# EAGLE board Skematik (EAGLE 9.6.2)
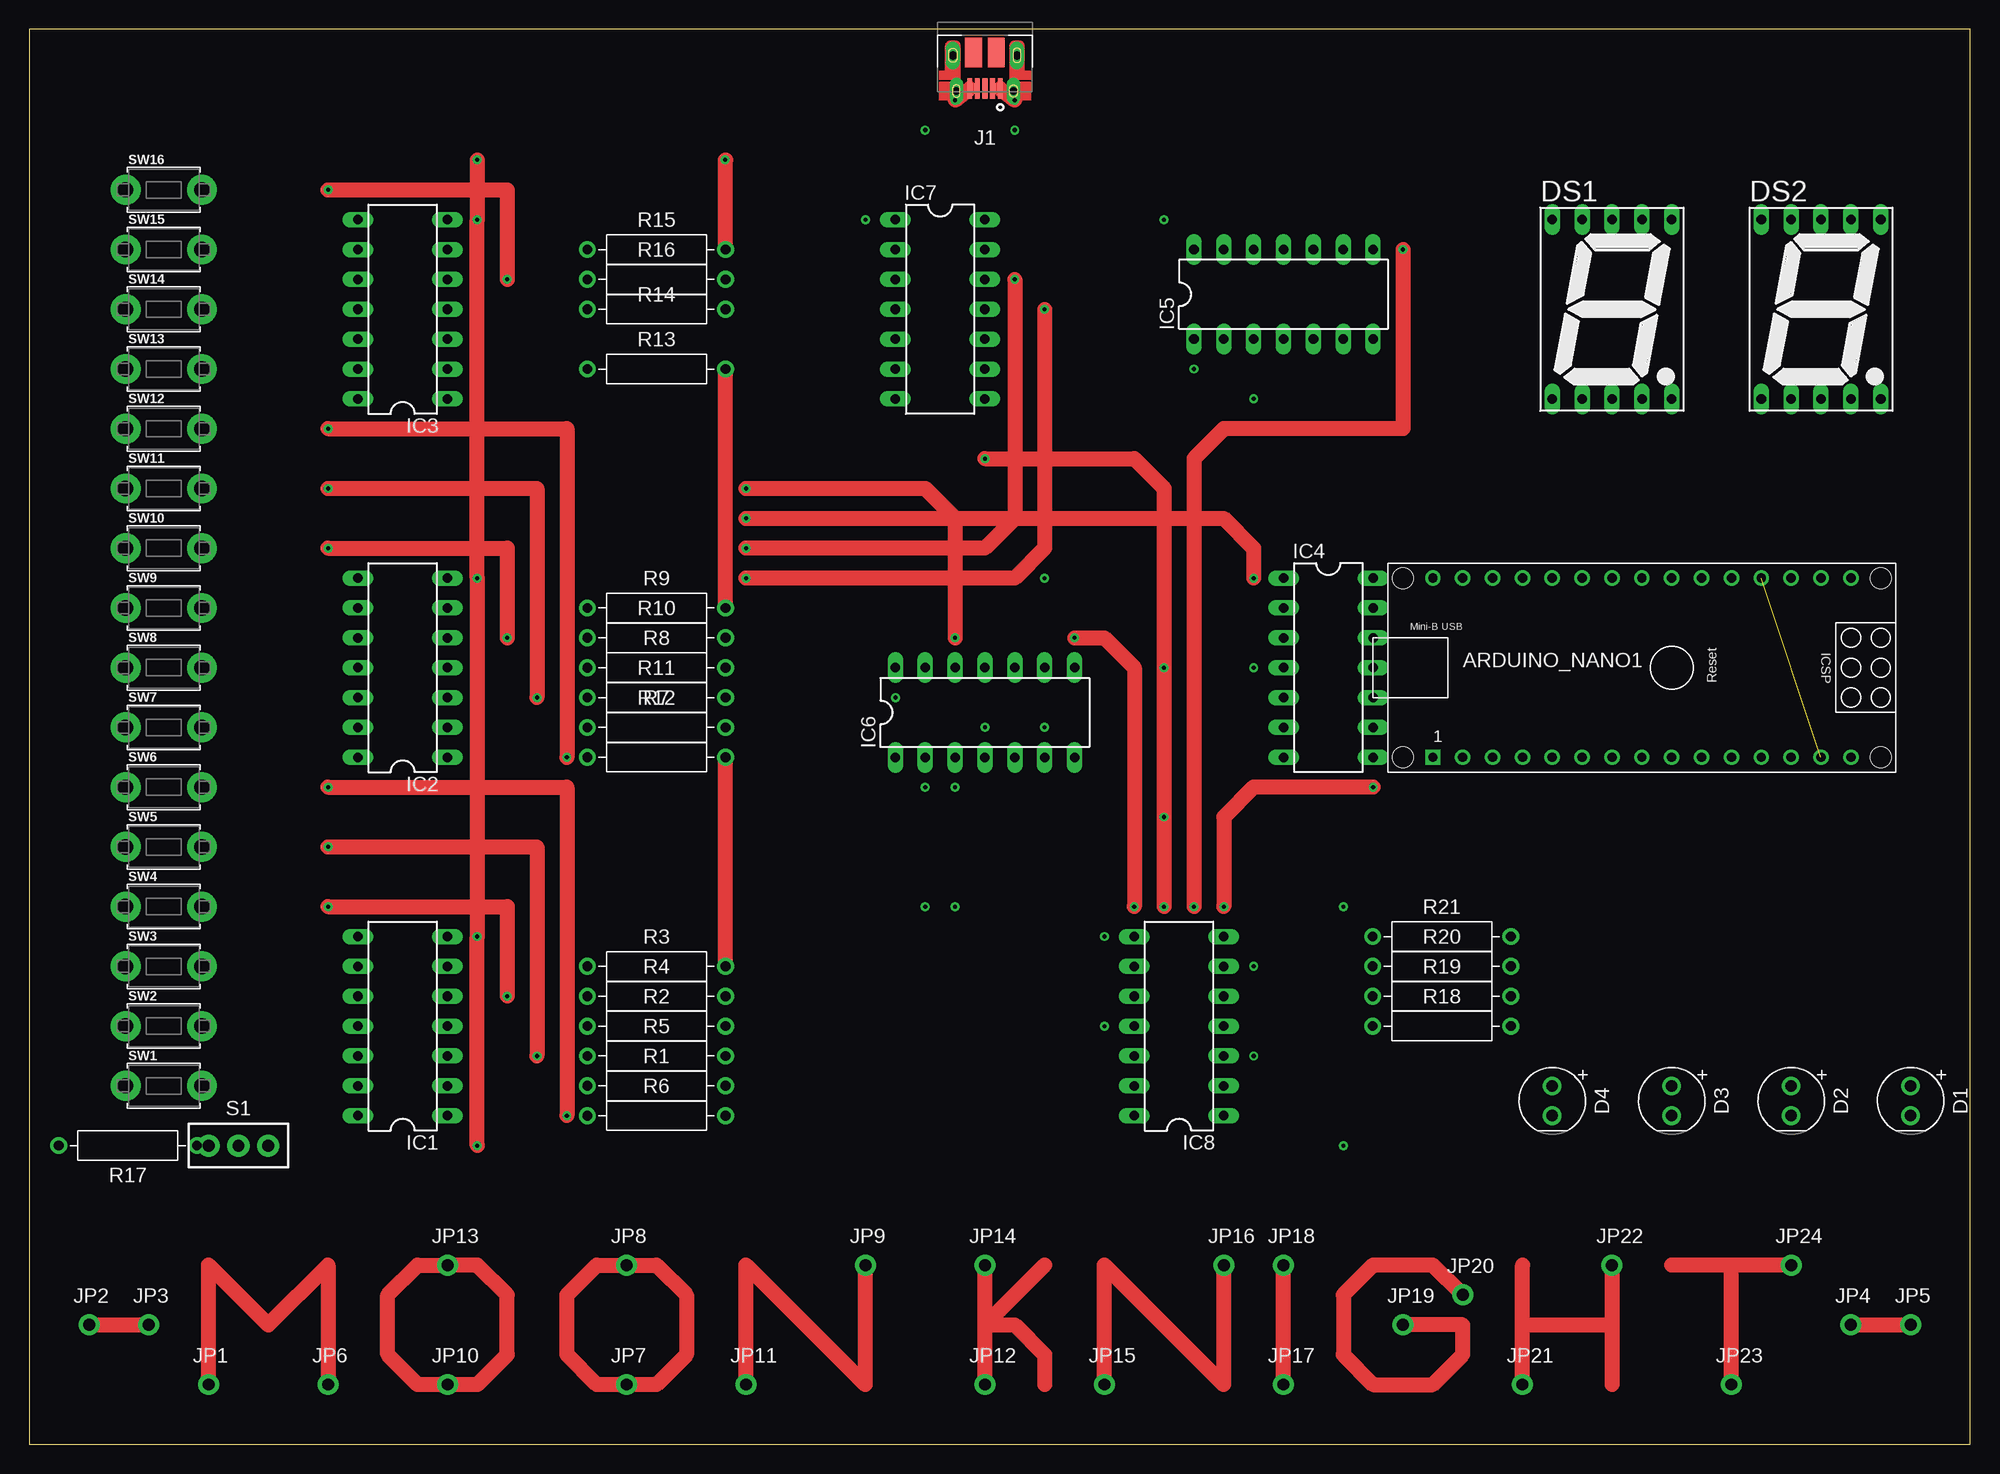
[diagram p0: board, top side]
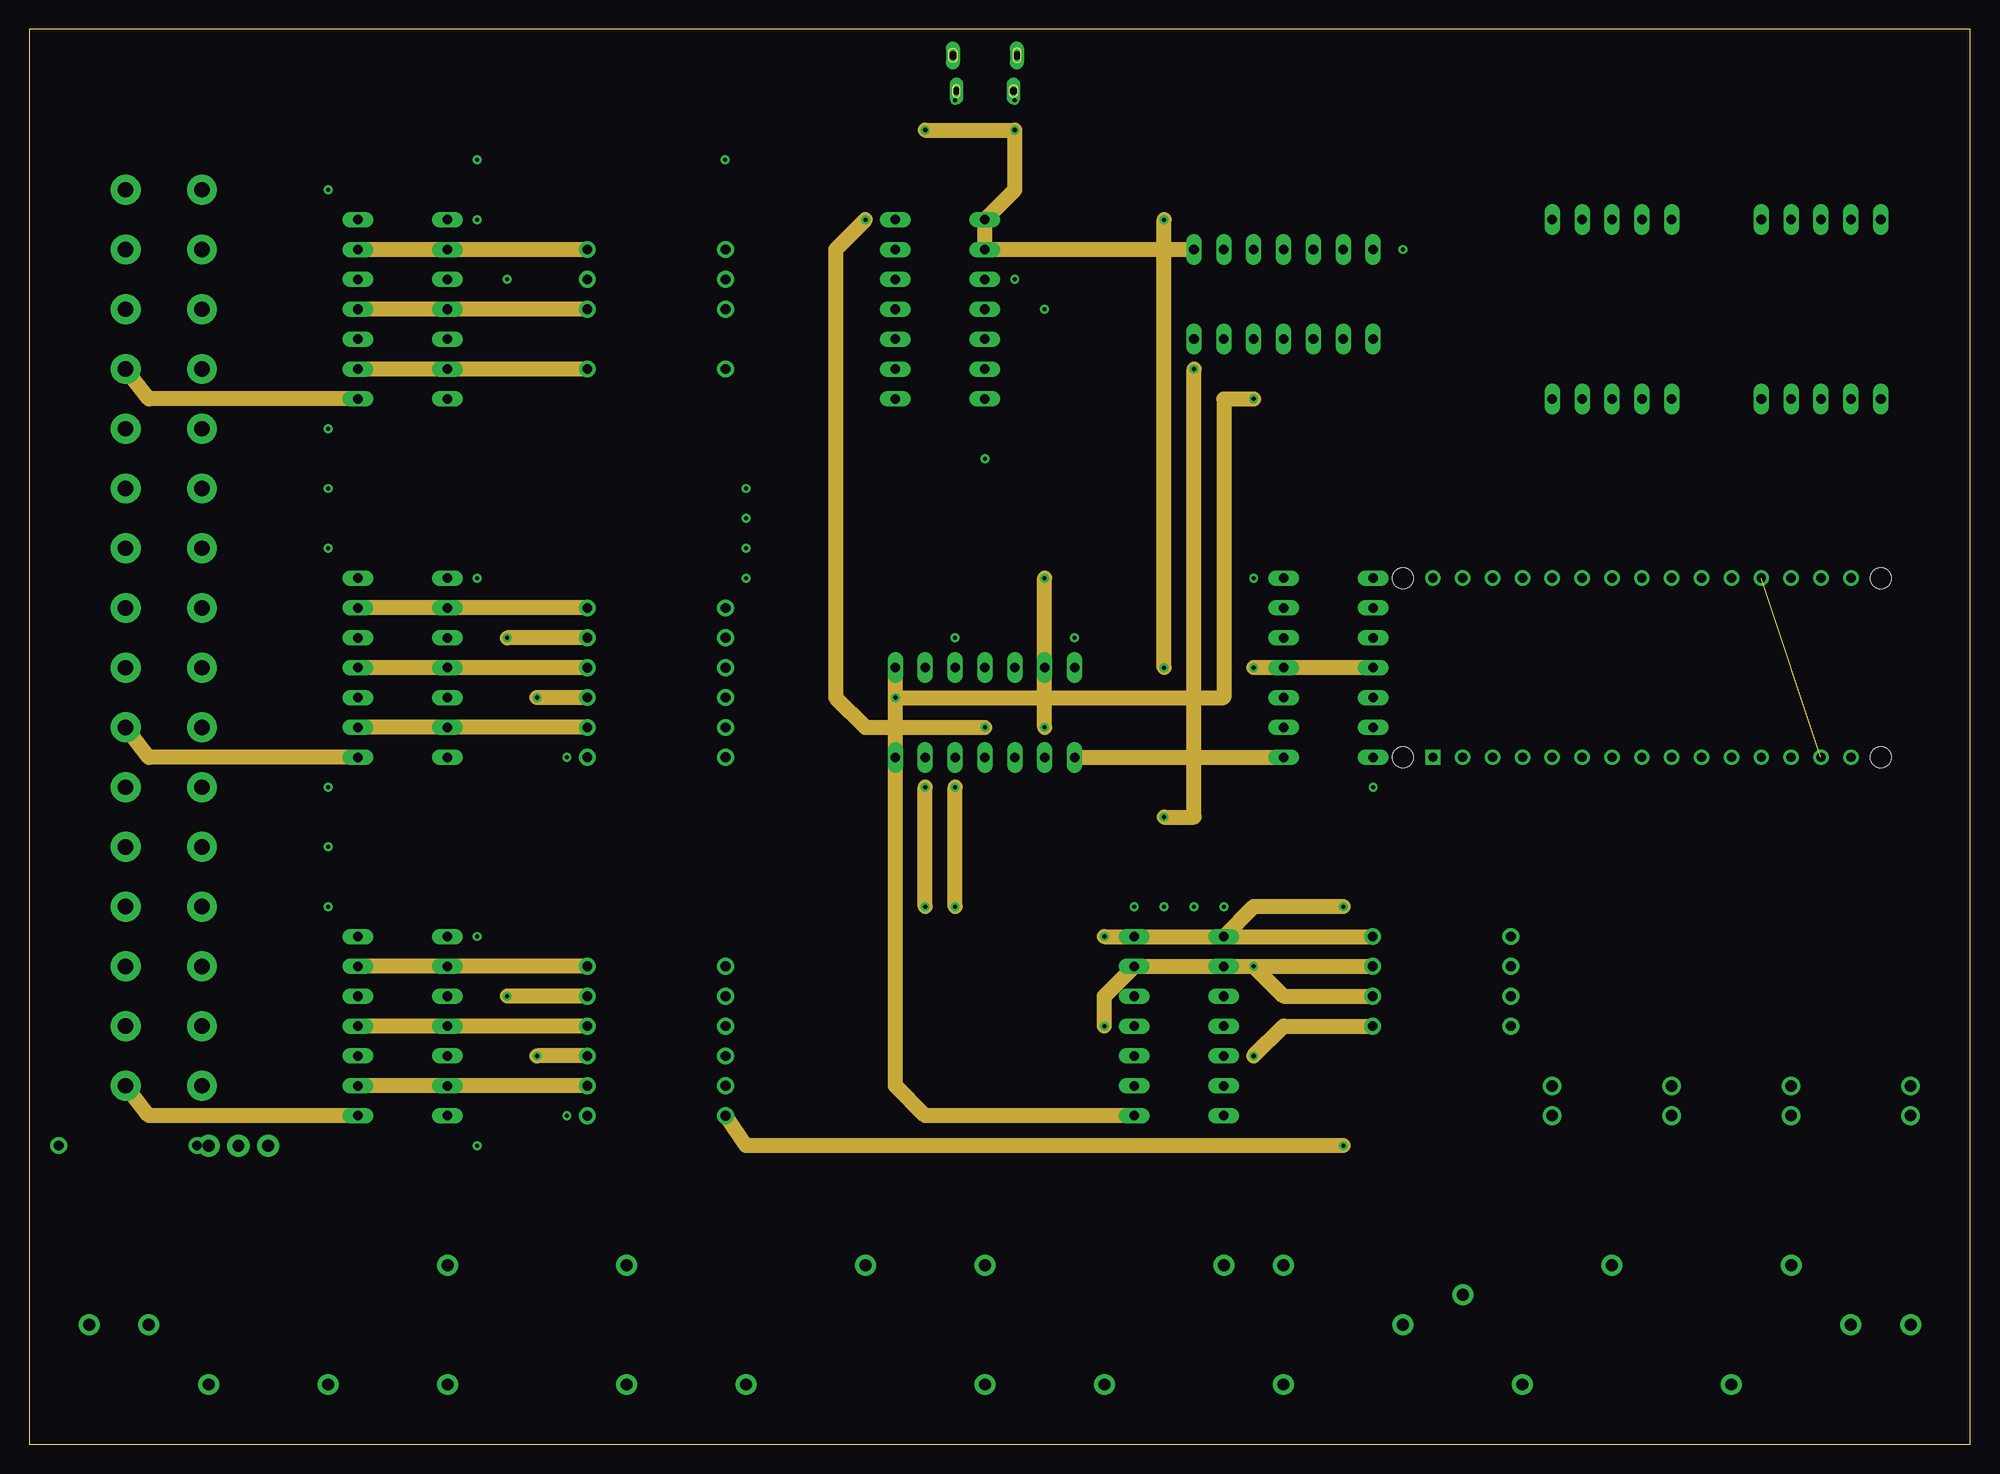
[diagram p1: board, inner layer Jumper]
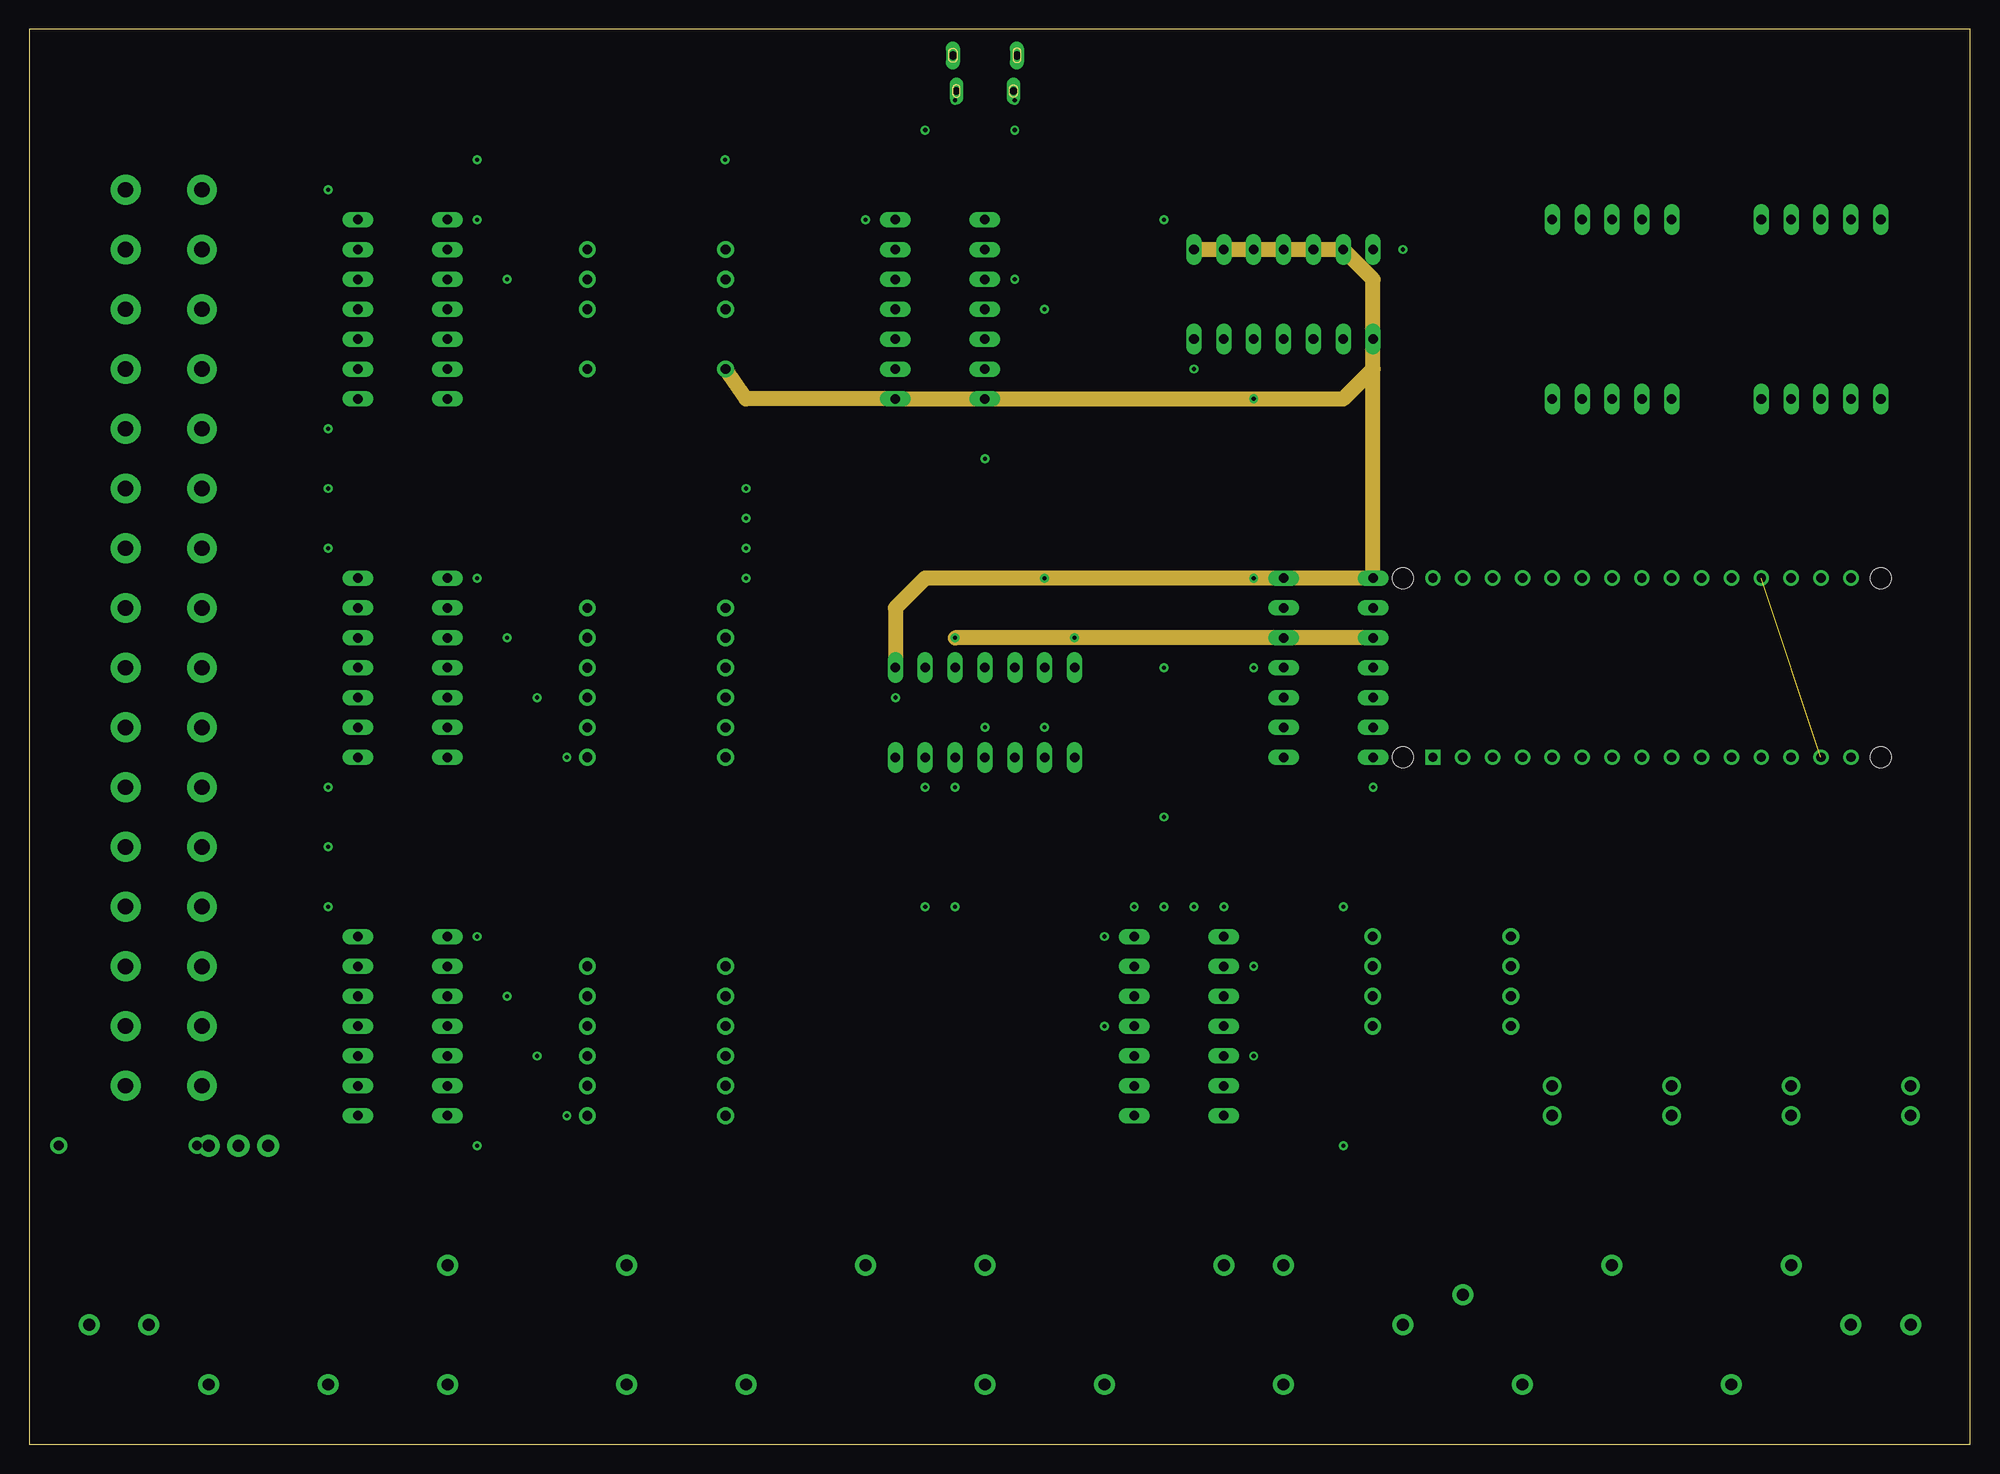
[diagram p2: board, inner layer Route15]
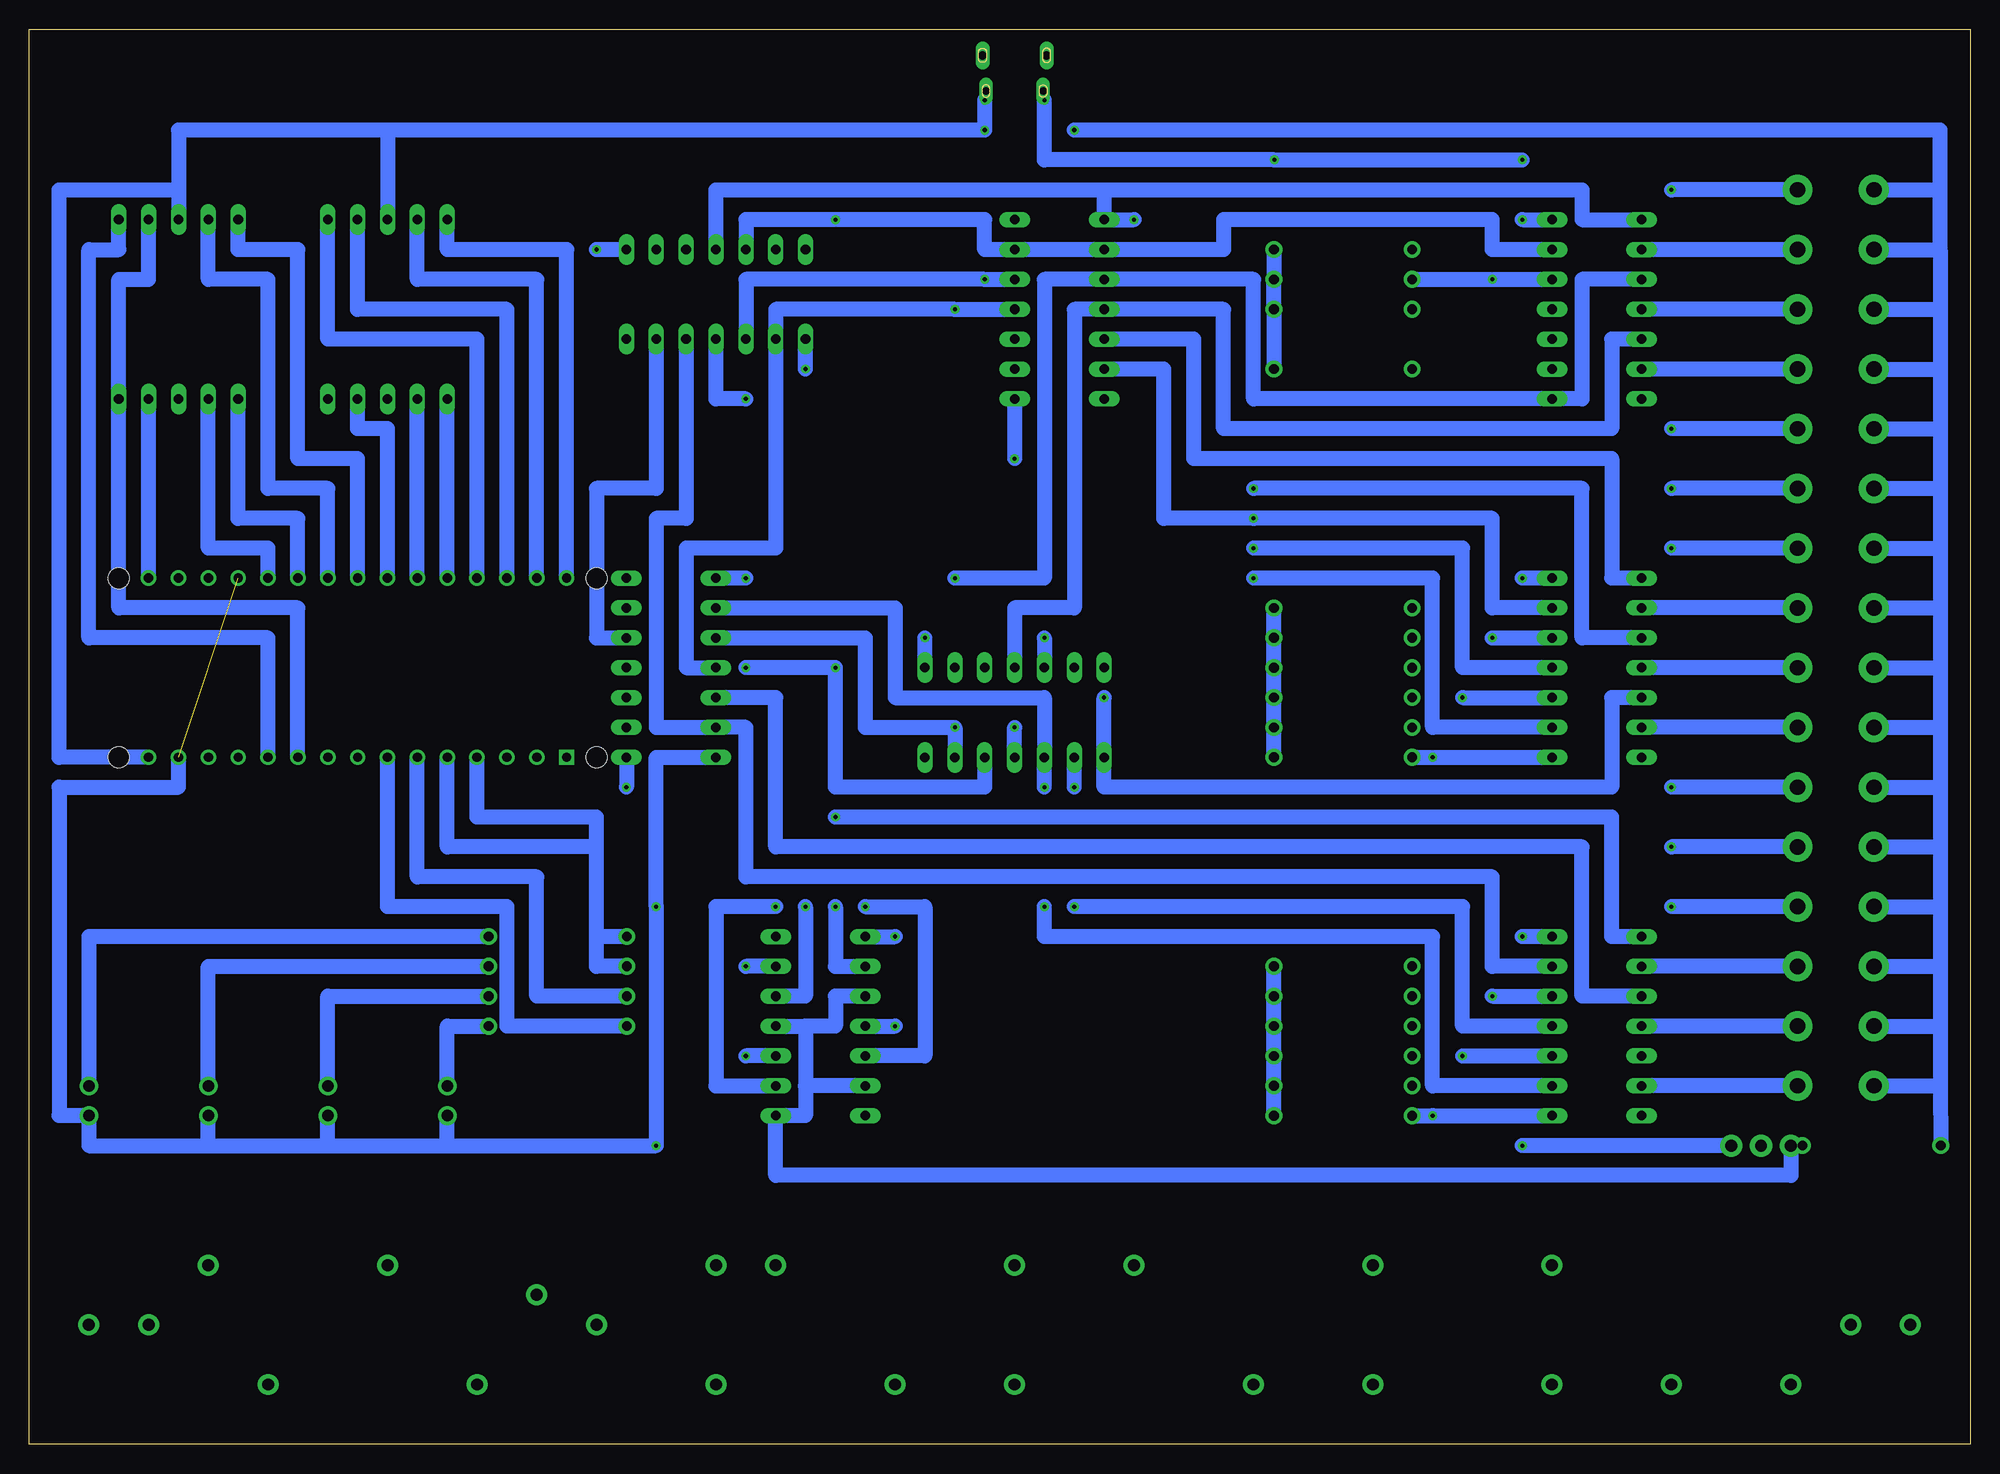
[diagram p3: board, bottom side, seen from below]

Size 165.08 x 120.32 mm. Coordinates in mm from the lower left corner, seen from the top.
Outline: 0,0 165.08,0 165.08,120.32 0,120.32 0,0
Copper layers (1+2*15+16): Top 0.035mm / dielectric 1.5mm / Jumper 0.035mm / dielectric 0.5mm / Route15 0.035mm / dielectric 0.2mm / Bottom 0.035mm
Design rules "default *": minimum track width 6mil, minimum drill 0.35mm, track to track 6mil, track to pad 6mil, pad to pad 6mil, via to via 6mil, smd to smd 6mil, copper to edge 40mil, drill to drill 6mil, minimum pad ring 10mil, minimum via ring 8mil, stop-mask expansion 4mil, vias tented up to drill 0mil, thermal gap 10mil

## Footprints (pad centres in the part's own frame; a part is rotated, then mirrored left to right if it is on the bottom)
ARDUINO_NANO = drill 0.8 square: 1 -20.32,-7.62 | drill 0.8: 2 -17.78,-7.62; 3 -15.24,-7.62; 4 -12.7,-7.62; 5 -10.16,-7.62; 6 -7.62,-7.62; 7 -5.08,-7.62; 8 -2.54,-7.62; 9 0,-7.62; 10 2.54,-7.62; 11 5.08,-7.62; 12 7.62,-7.62; 13 10.16,-7.62; 14 12.7,-7.62; 15 15.24,-7.62; 16 15.24,7.62; 17 12.7,7.62; 18 10.16,7.62; 19 7.62,7.62; 20 5.08,7.62; 21 2.54,7.62; 22 0,7.62; 23 -2.54,7.62; 24 -5.08,7.62; 25 -7.62,7.62; 26 -10.16,7.62; 27 -12.7,7.62; 28 -15.24,7.62; 29 -17.78,7.62; 30 -20.32,7.62 | hole 1.778: -22.86,-7.62; -22.86,7.62; 17.78,7.62; 17.78,-7.62
LEDRD254W60D565H860B_W = drill 0.981 pad 1.581: 1 -1.27,0; 2 1.27,0
LEDRD254W60D565H860B_Y = drill 0.981 pad 1.581: 1 -1.27,0; 2 1.27,0
LEDRD254W60D565H860B_B = drill 0.981 pad 1.581: 1 -1.27,0; 2 1.27,0
LEDRD254W60D565H860B = drill 0.981 pad 1.581: 1 -1.27,0; 2 1.27,0
7SEG-13 = drill 0.813 long: 1 -5.08,-7.62; 2 -2.54,-7.62; 3 0,-7.62; 4 2.54,-7.62; 5 5.08,-7.62; 6 5.08,7.62; 7 2.54,7.62; 8 0,7.62; 9 -2.54,7.62; 10 -5.08,7.62
DIL14 = drill 0.813 long: 1 -7.62,-3.81; 2 -5.08,-3.81; 3 -2.54,-3.81; 4 0,-3.81; 5 2.54,-3.81; 6 5.08,-3.81; 7 7.62,-3.81; 8 7.62,3.81; 9 5.08,3.81; 10 2.54,3.81; 11 0,3.81; 12 -2.54,3.81; 13 -5.08,3.81; 14 -7.62,3.81
10103594 = smd 0.4 x 1.75: 1 -1.3,2.825; 2 -0.65,2.825; 3 0,2.825; 4 0.65,2.825; 5 1.3,2.825 | smd 1.425 x 2.5: 6 -0.963,-0.25; 7 0.963,-0.25 | drill 0.65 pad 0.73 long: SH1 -2.425,3.03; SH2 2.425,3.03 | drill 0.7 long: SH3 -2.725,0; SH4 2.725,0
1X01-CLEANBIG = drill 1.016 pad 1.778: 1 0,0
RESAD1176W63L850D250B = drill 0.83 pad 1.43: 1 -5.88,0; 2 5.88,0
SWITCH-SPDT-PTH-8.5X3.7MM = drill 1.016 pad 1.88: 1 -2.54,0; 2 0,0; 3 2.54,0
TACT_PANA-EVQ = drill 1.3 pad 2.54: P$1 -3.25,0; P$2 3.25,0

## Placement (x,y rotation side)
ARDUINO_NANO1  [ARDUINO_NANO]  139.7,66.04 0 top
D1  LED_WHITE  [LEDRD254W60D565H860B_W]  160.02,29.21 270 top
D2  LED_YELLOW  [LEDRD254W60D565H860B_Y]  149.86,29.21 270 top
D3  LED_BLUE  [LEDRD254W60D565H860B_B]  139.7,29.21 270 top
D4  LED_RED  [LEDRD254W60D565H860B]  129.54,29.21 270 top
DS1  7SEG-CA  [7SEG-13]  134.62,96.52 0 top
DS2  7SEG-CA  [7SEG-13]  152.4,96.52 0 top
IC1  74LS04N  [DIL14]  31.75,35.56 90 top
IC2  74LS04N  [DIL14]  31.75,66.04 90 top
IC3  74LS04N  [DIL14]  31.75,96.52 90 top
IC4  74LS30N  [DIL14]  110.49,66.04 270 top
IC5  74LS30N  [DIL14]  106.68,97.79 0 top
IC6  74LS30N  [DIL14]  81.28,62.23 0 top
IC7  74LS30N  [DIL14]  77.47,96.52 270 top
IC8  74LS08N  [DIL14]  97.79,35.56 90 top
J1  10103594  [10103594]  81.28,118.11 180 top
JP1  [1X01-CLEANBIG]  15.24,5.08 0 top
JP2  [1X01-CLEANBIG]  5.08,10.16 0 top
JP3  [1X01-CLEANBIG]  10.16,10.16 0 top
JP4  [1X01-CLEANBIG]  154.94,10.16 0 top
JP5  [1X01-CLEANBIG]  160.02,10.16 0 top
JP6  [1X01-CLEANBIG]  25.4,5.08 0 top
JP7  [1X01-CLEANBIG]  50.8,5.08 0 top
JP8  [1X01-CLEANBIG]  50.8,15.24 0 top
JP9  [1X01-CLEANBIG]  71.12,15.24 0 top
JP10  [1X01-CLEANBIG]  35.56,5.08 0 top
JP11  [1X01-CLEANBIG]  60.96,5.08 0 top
JP12  [1X01-CLEANBIG]  81.28,5.08 0 top
JP13  [1X01-CLEANBIG]  35.56,15.24 0 top
JP14  [1X01-CLEANBIG]  81.28,15.24 0 top
JP15  [1X01-CLEANBIG]  91.44,5.08 0 top
JP16  [1X01-CLEANBIG]  101.6,15.24 0 top
JP17  [1X01-CLEANBIG]  106.68,5.08 0 top
JP18  [1X01-CLEANBIG]  106.68,15.24 0 top
JP19  [1X01-CLEANBIG]  116.84,10.16 0 top
JP20  [1X01-CLEANBIG]  121.92,12.7 0 top
JP21  [1X01-CLEANBIG]  127,5.08 0 top
JP22  [1X01-CLEANBIG]  134.62,15.24 0 top
JP23  [1X01-CLEANBIG]  144.78,5.08 0 top
JP24  [1X01-CLEANBIG]  149.86,15.24 0 top
R1  [RESAD1176W63L850D250B]  53.34,30.48 0 top
R2  [RESAD1176W63L850D250B]  53.34,35.56 0 top
R3  [RESAD1176W63L850D250B]  53.34,40.64 0 top
R4  [RESAD1176W63L850D250B]  53.34,38.1 0 top
R5  [RESAD1176W63L850D250B]  53.34,33.02 0 top
R6  [RESAD1176W63L850D250B]  53.34,27.94 0 top
R7  [RESAD1176W63L850D250B]  53.34,60.96 0 top
R8  [RESAD1176W63L850D250B]  53.34,66.04 0 top
R9  [RESAD1176W63L850D250B]  53.34,71.12 0 top
R10  [RESAD1176W63L850D250B]  53.34,68.58 0 top
R11  [RESAD1176W63L850D250B]  53.34,63.5 0 top
R12  [RESAD1176W63L850D250B]  53.34,58.42 0 top
R13  [RESAD1176W63L850D250B]  53.34,91.44 0 top
R14  [RESAD1176W63L850D250B]  53.34,96.52 0 top
R15  [RESAD1176W63L850D250B]  53.34,101.6 0 top
R16  [RESAD1176W63L850D250B]  53.34,99.06 0 top
R17  [RESAD1176W63L850D250B]  8.38,25.4 180 top
R18  [RESAD1176W63L850D250B]  120.14,35.56 0 top
R19  [RESAD1176W63L850D250B]  120.14,38.1 0 top
R20  [RESAD1176W63L850D250B]  120.14,40.64 0 top
R21  [RESAD1176W63L850D250B]  120.14,43.18 0 top
S1  TOGGLE  [SWITCH-SPDT-PTH-8.5X3.7MM]  17.78,25.4 0 top
SW1  [TACT_PANA-EVQ]  11.43,30.48 0 top
SW2  [TACT_PANA-EVQ]  11.43,35.56 0 top
SW3  [TACT_PANA-EVQ]  11.43,40.64 0 top
SW4  [TACT_PANA-EVQ]  11.43,45.72 0 top
SW5  [TACT_PANA-EVQ]  11.43,50.8 0 top
SW6  [TACT_PANA-EVQ]  11.43,55.88 0 top
SW7  [TACT_PANA-EVQ]  11.43,60.96 0 top
SW8  [TACT_PANA-EVQ]  11.43,66.04 0 top
SW9  [TACT_PANA-EVQ]  11.43,71.12 0 top
SW10  [TACT_PANA-EVQ]  11.43,76.2 0 top
SW11  [TACT_PANA-EVQ]  11.43,81.28 0 top
SW12  [TACT_PANA-EVQ]  11.43,86.36 0 top
SW13  [TACT_PANA-EVQ]  11.43,91.44 0 top
SW14  [TACT_PANA-EVQ]  11.43,96.52 0 top
SW15  [TACT_PANA-EVQ]  11.43,101.6 0 top
SW16  [TACT_PANA-EVQ]  11.43,106.68 0 top

## Library data of the parts
ARDUINO_NANO1 = ArduinoNanoV30
D1-D4 = Opto-Electronic; CATEGORY: Opto-Electronic; SUB-CATEGORY: LED
DS1 DS2 = Opto-Electronic; CATEGORY: Opto-Electronic; SUB-CATEGORY: Display; TYPE: 7-Segment
IC1 IC2 IC4-IC8 = 74xx-us
IC3 = 74xx-us; SPICEPREFIX: I
J1 = Connector_USB; CATEGORY: Connectors; CONTACTS: 5; CURRENT-RATING: 1.8A; DESCRIPTION: CONN RCPT USB2.0 MICRO B SMD R/A; GENDER: Receptacle; MANUFACTURER: Amphenol ICC (FCI); MOUNT_TYPE: R/A; MPN: 10103594-0001LF; OPERATING_TEMPERATURE: -30°C ~ 80°C; PART_STATUS: ACTIVE; ROHS_COMPLIANT: COMPLIANT; SUB_CATEGORY: USB; TYPE: USB-micro B; VOLTAGE-RATING: 100VAC
JP1-JP24 SW1-SW16 = adafruit
R1-R21 = Resistor; CATEGORY: Resistor; SUB-CATEGORY: Fixed
S1 = Tinkercad

## Nets
0: IC1.13 R1.1 SW1.P$2
1: IC1.11 R2.1 SW2.P$2
2: IC1.9 R3.1 SW3.P$2
3: IC1.5 R4.1 SW4.P$2
4: IC1.3 R5.1 SW5.P$2
5: IC1.1 R6.1 SW6.P$2
5V: ARDUINO_NANO1.12
6: IC2.13 R7.1 SW7.P$2
7: IC2.11 R8.1 SW8.P$2
8: IC2.9 R9.1 SW9.P$2
9: IC2.5 R10.1 SW10.P$2
-D1: ARDUINO_NANO1.4 IC8.8 R21.1
-D2: ARDUINO_NANO1.5 IC8.11 R20.1
-D3: ARDUINO_NANO1.6 IC8.6 R19.1
-D4: ARDUINO_NANO1.7 IC8.3 R18.1
A: IC2.3 R11.1 SW11.P$2
A1: ARDUINO_NANO1.28 DS1.7
A2: ARDUINO_NANO1.10 DS2.7
B: IC2.1 R12.1 SW12.P$2
B1: ARDUINO_NANO1.27 DS1.6
B2: ARDUINO_NANO1.11 DS2.6
C: IC3.13 R13.1 SW13.P$2
C1: ARDUINO_NANO1.24 DS1.4
C2: ARDUINO_NANO1.16 DS2.4
D: IC3.11 R14.1 SW14.P$2
D1: D1.1 R21.2
D1': ARDUINO_NANO1.25 DS1.2
D2: D2.1 R20.2
D2': ARDUINO_NANO1.20 DS2.2
D3: D3.1 R19.2
D4: D4.1 R18.2
E: IC3.9 R15.1 SW15.P$2
E1: ARDUINO_NANO1.26 DS1.1
E2: ARDUINO_NANO1.21 DS2.1
EN: IC8.1 IC8.4 IC8.10 IC8.13 R17.1 S1.1
F: IC3.5 R16.1 SW16.P$2
F1: ARDUINO_NANO1.29 DS1.9
F2: ARDUINO_NANO1.22 DS2.9
G: JP19.1 JP20.1
G1: ARDUINO_NANO1.30 DS1.10
G2: ARDUINO_NANO1.23 DS2.10
GND: ARDUINO_NANO1.14 ARDUINO_NANO1.19 D1.2 D2.2 D3.2 D4.2 IC1.7 IC2.7 IC3.7 IC4.7 IC5.7 IC6.7 IC7.7 IC8.7 J1.5 R1.2 R2.2 R3.2 R4.2 R5.2 R6.2 R7.2 R8.2 R9.2 R10.2 R11.2 R12.2 R13.2 R14.2 R15.2 R16.2 S1.3
H: JP21.1 JP22.1
I: JP17.1 JP18.1
K: JP12.1 JP14.1
M: JP1.1 JP6.1
N$5: ARDUINO_NANO1.8
N$6: ARDUINO_NANO1.9
N$24: ARDUINO_NANO1.1
N': JP9.1 JP11.1
N'': JP15.1 JP16.1
O0: IC7.8 IC8.9
O1: IC6.8 IC8.12
O2: IC5.8 IC8.5
O3: IC4.8 IC8.2
O': JP10.1 JP13.1
O'': JP7.1 JP8.1
STRIP1: JP2.1 JP3.1
STRIP2: JP4.1 JP5.1
T: JP23.1 JP24.1
VCC: ARDUINO_NANO1.15 DS1.8 DS2.8 IC1.14 IC2.14 IC3.14 IC4.14 IC5.14 IC6.14 IC7.14 IC8.14 J1.1 R17.2 SW1.P$1 SW2.P$1 SW3.P$1 SW4.P$1 SW5.P$1 SW6.P$1 SW7.P$1 SW8.P$1 SW9.P$1 SW10.P$1 SW11.P$1 SW12.P$1 SW13.P$1 SW14.P$1 SW15.P$1 SW16.P$1
~0: IC1.12
~1: IC1.10 IC4.5
~2: IC1.8 IC5.1
~3: IC1.6 IC4.6 IC5.5
~4: IC1.4 IC6.2
~5: IC1.2 IC4.2 IC6.3
~6: IC2.12 IC5.4 IC6.1
~7: IC2.10 IC4.12 IC5.6 IC6.12
~8: IC2.8 IC7.5
~9: IC2.6 IC4.1 IC7.6
~A: IC2.4 IC5.3 IC7.12
~B: IC2.2 IC4.4 IC5.2 IC7.11
~C: IC3.12 IC6.11 IC7.4
~D: IC3.10 IC4.3 IC6.6 IC7.3
~E: IC3.8 IC5.11 IC6.4 IC7.1
~F: IC3.6 IC4.11 IC5.12 IC6.5 IC7.2

## Tracks (layer width: path | path; a pad name or v marks a point on that pad's centre or on a via)
0
  Jumper 1.27: R1.1 IC1.13
  Bottom 1.27: SW1.P$2 IC1.13
1
  Jumper 1.27: R2.1 IC1.11
  Bottom 1.27: SW2.P$2 IC1.11
2
  Jumper 1.27: R3.1 IC1.9
  Bottom 1.27: SW3.P$2 IC1.9
3  (via drill 0.35)
  Top 1.27: v25.4,45.72 40.64,45.72 v40.64,38.1
  Jumper 1.27: R4.1 v40.64,38.1
  Bottom 1.27: SW4.P$2 v25.4,45.72 | v40.64,38.1 IC1.5
4  (via drill 0.35)
  Top 1.27: v25.4,50.8 43.18,50.8 v43.18,33.02
  Jumper 1.27: R5.1 v43.18,33.02
  Bottom 1.27: SW5.P$2 v25.4,50.8 | v43.18,33.02 IC1.3
5  (via drill 0.35)
  Top 1.27: v25.4,55.88 45.72,55.88 v45.72,27.94
  Bottom 1.27: SW6.P$2 v25.4,55.88 | IC1.1 v45.72,27.94 R6.1
6
  Jumper 1.27: R7.1 IC2.13
  Bottom 1.27: SW7.P$2 IC2.13
7
  Jumper 1.27: R8.1 IC2.11
  Bottom 1.27: SW8.P$2 IC2.11
8
  Jumper 1.27: R9.1 IC2.9
  Bottom 1.27: SW9.P$2 IC2.9
9  (via drill 0.35)
  Top 1.27: v25.4,76.2 40.64,76.2 v40.64,68.58
  Jumper 1.27: R10.1 v40.64,68.58
  Bottom 1.27: SW10.P$2 v25.4,76.2 | v40.64,68.58 IC2.5
-D1  (via drill 0.35)
  Jumper 1.27: v91.44,43.18 v114.3,43.18
  Bottom 1.27: IC8.8 v91.44,43.18 | ARDUINO_NANO1.4 127,53.34 116.84,53.34 116.84,43.18 R21.1 v114.3,43.18
-D2  (via drill 0.35)
  Jumper 1.27: v91.44,35.56 91.44,38.1 93.98,40.64 v114.3,40.64
  Bottom 1.27: IC8.11 v91.44,35.56 | v114.3,40.64 R20.1 116.84,40.64 116.84,50.8 129.54,50.8 ARDUINO_NANO1.5
-D3  (via drill 0.35)
  Jumper 1.27: v104.14,40.64 106.68,38.1 v114.3,38.1
  Bottom 1.27: IC8.6 v104.14,40.64 | ARDUINO_NANO1.6 132.08,48.26 121.92,48.26 121.92,38.1 R19.1 v114.3,38.1
-D4  (via drill 0.35)
  Jumper 1.27: v104.14,33.02 106.68,35.56 v114.3,35.56
  Bottom 1.27: IC8.3 v104.14,33.02 | v114.3,35.56 R18.1 124.46,35.56 124.46,45.72 134.62,45.72 ARDUINO_NANO1.7
A  (via drill 0.35)
  Top 1.27: v25.4,81.28 43.18,81.28 v43.18,63.5
  Jumper 1.27: R11.1 v43.18,63.5
  Bottom 1.27: SW11.P$2 v25.4,81.28 | v43.18,63.5 IC2.3
A1
  Bottom 1.27: ARDUINO_NANO1.28 124.46,96.52 137.16,96.52 DS1.7
A2
  Bottom 1.27: ARDUINO_NANO1.10 142.24,71.12 157.48,71.12 157.48,99.06 154.94,99.06 DS2.7
B  (via drill 0.35)
  Top 1.27: v25.4,86.36 45.72,86.36 v45.72,58.42
  Bottom 1.27: SW12.P$2 v25.4,86.36 | IC2.1 v45.72,58.42 R12.1
B1
  Bottom 1.27: ARDUINO_NANO1.27 127,93.98 139.7,93.98 DS1.6
B2
  Bottom 1.27: ARDUINO_NANO1.11 144.78,68.58 160.02,68.58 160.02,101.6 157.48,101.6 DS2.6
C
  Jumper 1.27: R13.1 IC3.13
  Bottom 1.27: SW13.P$2 IC3.13
C1
  Bottom 1.27: ARDUINO_NANO1.24 134.62,86.36 137.16,86.36 DS1.4
C2
  Bottom 1.27: ARDUINO_NANO1.16 DS2.4
D
  Jumper 1.27: R14.1 IC3.11
  Bottom 1.27: SW14.P$2 IC3.11
D1
  Bottom 1.27: D1.1 160.02,43.18 R21.2
D1'
  Bottom 1.27: ARDUINO_NANO1.25 DS1.2
D2
  Bottom 1.27: D2.1 149.86,40.64 R20.2
D2'
  Bottom 1.27: ARDUINO_NANO1.20 144.78,76.2 149.86,76.2 DS2.2
D3
  Bottom 1.27: D3.1 139.7,38.1 R19.2
D4
  Bottom 1.27: D4.1 129.54,35.56 R18.2
E
  Jumper 1.27: R15.1 IC3.9
  Bottom 1.27: SW15.P$2 IC3.9
E1
  Bottom 1.27: ARDUINO_NANO1.26 DS1.1
E2
  Bottom 1.27: ARDUINO_NANO1.21 142.24,78.74 147.32,78.74 DS2.1
EN
  Bottom 1.27: IC8.4 99.06,35.56 | 99.06,35.56 99.06,30.48 | 99.06,30.48 99.06,27.94 IC8.1 101.6,22.86 15.24,22.86 S1.1 R17.1 | IC8.10 96.52,38.1 96.52,35.56 99.06,35.56 | IC8.13 99.06,30.48
F  (via drill 0.35)
  Top 1.27: v25.4,106.68 40.64,106.68 v40.64,99.06
  Bottom 1.27: SW16.P$2 v25.4,106.68 | IC3.5 v40.64,99.06 R16.1
F1
  Bottom 1.27: ARDUINO_NANO1.29 121.92,99.06 132.08,99.06 DS1.9
F2
  Bottom 1.27: ARDUINO_NANO1.22 139.7,81.28 144.78,81.28 144.78,99.06 149.86,99.06 DS2.9
G
  Top 1.27: JP20.1 119.38,15.24 114.3,15.24 111.76,12.7 111.76,7.62 114.3,5.08 119.38,5.08 121.92,7.62 121.92,10.16 JP19.1
G1
  Bottom 1.27: ARDUINO_NANO1.30 119.38,101.6 129.54,101.6 DS1.10
G2
  Bottom 1.27: ARDUINO_NANO1.23 137.16,83.82 142.24,83.82 142.24,101.6 147.32,101.6 DS2.10
GND  (via drill 0.35)  (1 unrouted)
  Top 1.27: v38.1,25.4 v38.1,43.18 v38.1,73.66 v38.1,104.14 v38.1,109.22 | R3.2 R12.2 | R9.2 R13.2 | R15.2 59.22,109.21 v59.18,109.22 | v78.74,114.3 J1.5
  Jumper 1.27: IC6.7 IC4.7 | IC8.7 104.14,45.72 v111.76,45.72 | v111.76,25.4 60.96,25.4 R6.2
  Route15 1.27: IC5.7 114.3,91.44 111.76,88.9 IC7.7 60.96,88.9 R13.2
  Bottom 1.27: 149.86,25.4 160.02,25.4 D1.2 162.56,27.94 162.56,55.88 152.4,55.88 ARDUINO_NANO1.14 | 149.86,25.4 D2.2 | 149.86,25.4 139.7,25.4 | 139.7,25.4 D3.2 | 139.7,25.4 129.54,25.4 | 129.54,25.4 D4.2 | R15.2 R16.2 R14.2 R13.2 | R12.2 R7.2 R11.2 R8.2 R10.2 R9.2 | R6.2 R1.2 R5.2 R2.2 R4.2 R3.2 | IC1.7 v38.1,43.18 | S1.3 v38.1,25.4 | IC2.7 v38.1,73.66 | v38.1,104.14 IC3.7 | v78.74,114.3 78.74,109.22 v59.18,109.22 v38.1,109.22 | 129.54,25.4 v111.76,25.4 v111.76,45.72 111.76,58.42 IC4.7
H
  Top 1.27: JP21.1 127,10.16 | 127,10.16 127,15.24 | 127,10.16 134.62,10.16 | JP22.1 134.62,10.16 | 134.62,10.16 134.62,5.08
I
  Top 1.27: JP17.1 JP18.1
K
  Top 1.27: JP12.1 81.28,10.16 | 81.28,10.16 JP14.1 | 81.28,10.16 83.82,10.16 86.36,7.62 86.36,5.08 | 81.28,10.16 86.36,15.24
M
  Top 1.27: JP1.1 15.24,15.24 20.32,10.16 25.4,15.24 JP6.1
N'
  Top 1.27: JP11.1 60.96,15.24 71.12,5.08 JP9.1
N''
  Top 1.27: JP15.1 91.44,15.24 101.6,5.08 JP16.1
O0  (via drill 0.35)
  Top 1.27: v81.28,83.82 93.98,83.82 96.52,81.28 v96.52,45.72
  Bottom 1.27: IC7.8 v81.28,83.82 | v96.52,45.72 96.52,40.64 IC8.9
O1  (via drill 0.35)
  Top 1.27: v88.9,68.58 91.44,68.58 93.98,66.04 v93.98,45.72
  Bottom 1.27: IC6.8 v88.9,68.58 | v93.98,45.72 88.9,45.72 88.9,33.02 IC8.12
O2  (via drill 0.35)
  Top 1.27: v116.84,101.6 116.84,86.36 101.6,86.36 99.06,83.82 v99.06,45.72
  Bottom 1.27: IC5.8 v116.84,101.6 | v99.06,45.72 99.06,38.1 IC8.5
O3  (via drill 0.35)
  Top 1.27: v114.3,55.88 104.14,55.88 101.6,53.34 v101.6,45.72
  Bottom 1.27: IC4.8 v114.3,55.88 | v101.6,45.72 106.68,45.72 106.68,30.48 IC8.2
O'
  Top 1.27: JP10.1 33.02,5.08 30.48,7.62 30.48,12.7 33.02,15.24 JP13.1 38.1,15.24 40.64,12.7 40.64,7.62 38.1,5.08 JP10.1
O''
  Top 1.27: JP7.1 48.26,5.08 45.72,7.62 45.72,12.7 48.26,15.24 JP8.1 53.34,15.24 55.88,12.7 55.88,7.62 53.34,5.08 JP7.1
STRIP1
  Top 1.27: JP2.1 JP3.1
STRIP2
  Top 1.27: JP4.1 JP5.1
T
  Top 1.27: JP23.1 144.78,15.24 | JP24.1 144.78,15.24 | 144.78,15.24 139.7,15.24
VCC  (via drill 0.35)
  Top 1.27: J1.1 v83.82,114.3
  Jumper 1.27: IC3.14 10.16,88.9 SW13.P$1 | IC2.14 10.16,58.42 SW7.P$1 | IC1.14 10.16,27.94 SW1.P$1 | IC5.14 86.36,101.6 83.82,101.6 81.28,101.6 IC7.14 83.82,106.68 v83.82,111.76 v76.2,111.76 | IC8.14 76.2,27.94 73.66,30.48 IC6.14
  Route15 1.27: IC6.14 73.66,71.12 76.2,73.66 IC4.14 114.3,99.06 111.76,101.6 IC5.14
  Bottom 1.27: SW16.P$1 2.54,106.68 | 2.54,101.6 2.54,106.68 | 2.54,101.6 2.54,96.52 | 2.54,96.52 2.54,91.44 | 2.54,91.44 2.54,86.36 | 2.54,86.36 2.54,81.28 | 2.54,81.28 2.54,76.2 | 2.54,76.2 2.54,71.12 | 2.54,71.12 2.54,66.04 | 2.54,66.04 2.54,60.96 | 2.54,60.96 2.54,55.88 | 2.54,55.88 2.54,50.8 | 2.54,50.8 2.54,45.72 | 2.54,45.72 2.54,40.64 | 2.54,40.64 2.54,35.56 | 2.54,35.56 2.54,30.48 | SW15.P$1 2.54,101.6 | SW14.P$1 2.54,96.52 | SW13.P$1 2.54,91.44 | SW12.P$1 2.54,86.36 | SW11.P$1 2.54,81.28 | SW10.P$1 2.54,76.2 | SW9.P$1 2.54,71.12 | SW8.P$1 2.54,66.04 | SW7.P$1 2.54,60.96 | SW6.P$1 2.54,55.88 | SW5.P$1 2.54,50.8 | SW4.P$1 2.54,45.72 | SW3.P$1 2.54,40.64 | SW2.P$1 2.54,35.56 | SW1.P$1 2.54,30.48 | v83.82,114.3 v83.82,111.76 134.62,111.76 | 134.62,111.76 152.4,111.76 152.4,106.68 | 152.4,106.68 DS2.8 | 134.62,111.76 DS1.8 | 2.54,106.68 2.54,111.76 v76.2,111.76 | ARDUINO_NANO1.15 162.56,58.42 162.56,106.68 152.4,106.68 | 2.54,30.48 R17.2
~1
  Bottom 1.27: IC1.10 33.02,38.1 33.02,50.8 101.6,50.8 101.6,63.5 IC4.5
~2  (via drill 0.35)
  Jumper 1.27: v96.52,53.34 99.06,53.34 v99.06,91.44
  Bottom 1.27: IC1.8 30.48,43.18 30.48,53.34 v96.52,53.34 | v99.06,91.44 IC5.1
~3
  Bottom 1.27: IC1.6 40.64,40.64 40.64,48.26 104.14,48.26 104.14,60.96 IC4.6 111.76,60.96 111.76,78.74 109.22,78.74 IC5.5
~4  (via drill 0.35)
  Jumper 1.27: v76.2,45.72 v76.2,55.88
  Bottom 1.27: IC1.4 43.18,35.56 43.18,45.72 v76.2,45.72 | v76.2,55.88 IC6.2
~5  (via drill 0.35)
  Jumper 1.27: v78.74,45.72 v78.74,55.88
  Bottom 1.27: IC1.2 45.72,30.48 45.72,43.18 78.74,43.18 v78.74,45.72 | v78.74,55.88 IC6.3 78.74,63.5 91.44,63.5 91.44,71.12 IC4.2
~6  (via drill 0.35)
  Jumper 1.27: v73.66,63.5 101.6,63.5 101.6,88.9 v104.14,88.9
  Bottom 1.27: IC2.12 30.48,63.5 30.48,55.88 73.66,55.88 IC6.1 v73.66,63.5 | v104.14,88.9 106.68,88.9 IC5.4
~7  (via drill 0.35)
  Top 1.27: v60.96,81.28 76.2,81.28 78.74,78.74 v78.74,68.58
  Route15 1.27: IC4.12 v78.74,68.58
  Bottom 1.27: IC2.10 33.02,68.58 33.02,81.28 v60.96,81.28 | v78.74,68.58 IC6.12 | IC5.6 111.76,81.28 116.84,81.28 116.84,68.58 IC4.12
~8
  Bottom 1.27: IC2.8 30.48,73.66 30.48,83.82 66.04,83.82 66.04,93.98 IC7.5
~9  (via drill 0.35)
  Top 1.27: v60.96,78.74 101.6,78.74 104.14,76.2 v104.14,73.66
  Bottom 1.27: IC2.6 40.64,71.12 40.64,78.74 v60.96,78.74 68.58,78.74 68.58,91.44 IC7.6 | v104.14,73.66 IC4.1
~A  (via drill 0.35)
  Top 1.27: v83.82,99.06 83.82,78.74 81.28,76.2 v60.96,76.2
  Bottom 1.27: IC2.4 43.18,66.04 43.18,76.2 v60.96,76.2 | IC7.12 v83.82,99.06 104.14,99.06 IC5.3
~B  (via drill 0.35)
  Top 1.27: v86.36,96.52 86.36,76.2 83.82,73.66 v60.96,73.66
  Bottom 1.27: IC2.2 45.72,60.96 45.72,73.66 58.42,73.66 v60.96,73.66 | IC7.11 v86.36,96.52 101.6,96.52 IC5.2 101.6,76.2 109.22,76.2 109.22,66.04 IC4.4
~C
  Bottom 1.27: IC3.12 30.48,93.98 30.48,86.36 63.5,86.36 63.5,96.52 IC7.4 76.2,96.52 76.2,71.12 81.28,71.12 IC6.11
~D  (via drill 0.35)
  Jumper 1.27: v86.36,60.96 v86.36,73.66
  Bottom 1.27: IC3.10 33.02,99.06 33.02,88.9 60.96,88.9 60.96,99.06 IC7.3 78.74,99.06 78.74,73.66 v86.36,73.66 | IC4.3 93.98,68.58 93.98,60.96 v86.36,60.96 IC6.6
~E  (via drill 0.35)
  Jumper 1.27: v81.28,60.96 71.12,60.96 68.58,63.5 68.58,101.6 v71.12,104.14
  Bottom 1.27: IC5.11 106.68,106.68 73.66,106.68 | 73.66,106.68 IC7.1 v71.12,104.14 | 73.66,106.68 33.02,106.68 33.02,104.14 IC3.8 | IC6.4 v81.28,60.96
~F  (via drill 0.35)
  Jumper 1.27: v96.52,66.04 v96.52,104.14 | IC4.11 v104.14,66.04
  Bottom 1.27: IC3.6 40.64,101.6 40.64,104.14 63.5,104.14 63.5,101.6 IC7.2 83.82,101.6 83.82,104.14 v96.52,104.14 104.14,104.14 IC5.12 | IC6.5 83.82,55.88 96.52,55.88 v96.52,66.04 v104.14,66.04
(copper drawn outside any net)
  shapes: Top area x2